# EAGLE board Lightbar (x2) (EAGLE 9.6.2)
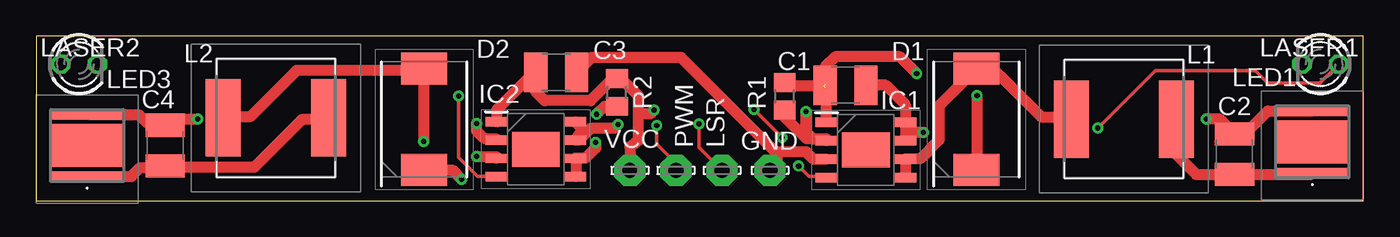
[diagram p0: board, top side]
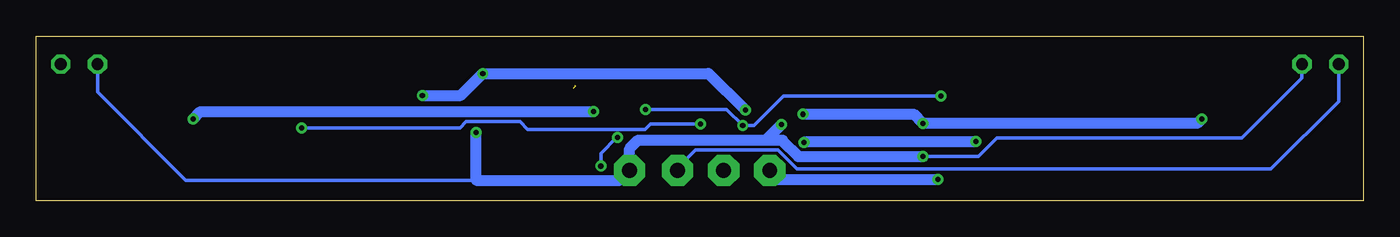
[diagram p1: board, bottom side, seen from below]

Size 91.42 x 11.35 mm. Coordinates in mm from the lower left corner, seen from the top.
Outline: 0,0 91.42,0 91.42,11.35 0,11.35 0,0
Copper layers (1*16): Top 0.035mm / dielectric 1.5mm / Bottom 0.035mm
Design rules "default": minimum track width 6mil, minimum drill 0.35mm, track to track 6mil, track to pad 6mil, pad to pad 6mil, via to via 6mil, smd to smd 6mil, copper to edge 40mil, drill to drill 6mil, minimum pad ring 10mil, minimum via ring 8mil, stop-mask expansion 4mil, vias tented up to drill 0mil, thermal gap 10mil

## Footprints (pad centres in the part's own frame; a part is rotated, then mirrored left to right if it is on the bottom)
C1210 = smd 1.6 x 2.7: 1 -1.4,0; 2 1.4,0
DIOM7959X262N = smd 2.2 x 3.15: 1 -3.5,0; 2 3.5,0
LSP10 = drill 1.016 pad 2.159 octagon: MP 0,0
SOIC127P600X175-9N = smd 1.525 x 0.65: 1 -2.712,1.905; 2 -2.712,0.635; 3 -2.712,-0.635; 4 -2.712,-1.905; 5 2.712,-1.905; 6 2.712,-0.635; 7 2.712,0.635; 8 2.712,1.905 | smd 3.3 x 2.41: 9 0,0
IHLP3232DZER330M11 = smd 2.413 x 5.334: 1 -3.619,0; 2 3.619,0
LED3MM = drill 0.813 octagon: A -1.27,0; K 1.27,0
XMLDWT0000000000U40E2 = smd 0.7 x 4.98: 1 -2.14,0; 2 2.14,0 | smd 2.98 x 4.98: 3 0,0
R0805 = smd 1.3 x 1.5: 1 -0.95,0; 2 0.95,0

## Placement (x,y rotation side)
C1  22μF  [C1210]  55.75,7.97 0 top
C2  10μF  [C1210]  82.55,3.22 90 top
C3  22μF  [C1210]  35.81,8.86 0 top
C4  10μF  [C1210]  8.89,3.81 90 top
D1  SS34-E3_57T  [DIOM7959X262N]  64.77,5.62 90 top
D2  SS34-E3_57T  [DIOM7959X262N]  26.73,5.62 90 top
GND  LSP10  [LSP10]  50.55,2.1 0 top
IC1  PAM2863ECR  [SOIC127P600X175-9N]  57.15,3.5 0 top
IC2  PAM2863ECR  [SOIC127P600X175-9N]  34.42,3.56 0 top
L1  IHLP3232DZER330M11  [IHLP3232DZER330M11]  74.93,5.64 0 top
L2  IHLP3232DZER330M11  [IHLP3232DZER330M11]  16.51,5.71 0 top
LASER1  TLLG4400  [LED3MM]  88.47,9.42 180 top
LASER2  TLLG4400  [LED3MM]  2.95,9.42 0 top
LED1  XMLDWT-00-0000-0000U40E2  [XMLDWT0000000000U40E2]  87.91,4.06 90 top
LED3  XMLDWT-00-0000-0000U40E2  [XMLDWT0000000000U40E2]  3.51,3.81 90 top
LSR  LSP10  [LSP10]  47.24,2.1 0 top
PWM  LSP10  [LSP10]  44.07,2.1 0 top
R1  0.05Ω 1/4W  [R0805]  51.56,7.21 90 top
R2  0.05Ω 1/4W  [R0805]  40.01,7.47 90 top
VCC  LSP10  [LSP10]  40.89,2.1 0 top

## Library data of the parts
C1-C4 = rcl; SPICEPREFIX: C
D1 D2 = SS34-E3_57T; DESCRIPTION: Vishay SS34-E3/57T SMT Schottky Diode, 40V 3A, 2-Pin DO-214AB; HEIGHT: 2.62mm; MANUFACTURER_NAME: Vishay; MANUFACTURER_PART_NUMBER: SS34-E3/57T; MOUSER_PART_NUMBER: 625-SS34-E3; MOUSER_PRICE-STOCK: https://www.mouser.co.uk/ProductDetail/Vishay-General-Semiconductor/SS34-E3-57T?qs=x2jpVgRnAtMC3f38kYWnRw%3D%3D
GND LSR PWM VCC = solpad
IC1 IC2 = PAM2863ECR; DESCRIPTION: Step-down LED Driver 1MHz 40V 2A SOP-8EP DiodesZetex PAM2863ECR LED Driver IC, 4.5 40 V dc 2A 8-Pin SOP; HEIGHT: 1.75mm; MANUFACTURER_NAME: Diodes Inc.; MANUFACTURER_PART_NUMBER: PAM2863ECR; MOUSER_PART_NUMBER: 621-PAM2863ECR; MOUSER_PRICE-STOCK: https://www.mouser.co.uk/ProductDetail/Diodes-Incorporated/PAM2863ECR?qs=pYVYkI7xuRXLW6Fe66wa3w%3D%3D
L1 L2 = IHLP3232DZER330M11; DESCRIPTION: VISHAY - IHLP3232DZER330M11 - INDUCTOR, POWER, 33UH, 3.2A, 20%; HEIGHT: 4mm; MANUFACTURER_NAME: Vishay; MANUFACTURER_PART_NUMBER: IHLP3232DZER330M11; MOUSER_PART_NUMBER: 70-IHLP3232DZER330M1; MOUSER_PRICE-STOCK: https://www.mouser.co.uk/ProductDetail/Vishay-Dale/IHLP3232DZER330M11?qs=Nbmv7C3%2FzlCWG7z%252BjqZ9qQ%3D%3D
LASER1 LASER2 = led; MF: VISHAY SEMICONDUCTOR; OC_FARNELL: 1612435
LED1 LED3 = XMLDWT-00-0000-0000U40E2; DESCRIPTION: High Power LEDs - White White 5700K 340lm; HEIGHT: 3.02mm; MANUFACTURER_NAME: CREE LED; MANUFACTURER_PART_NUMBER: XMLDWT-00-0000-0000U40E2; MOUSER_PART_NUMBER: 941-XMLDWT0000U40E2; MOUSER_PRICE-STOCK: https://www.mouser.co.uk/ProductDetail/Cree-Inc/XMLDWT-00-0000-0000U40E2?qs=OlC7AqGiEDlKbRHig9Whrw%3D%3D
R1 R2 = rcl; SPICEPREFIX: R

## Nets
GND: C1.2 C3.2 GND.MP IC1.3 IC1.7 IC1.8 IC2.3 IC2.7 IC2.8 LASER1.K LASER2.K
N$1: C2.1 L1.2 LED1.1
N$3: C2.2 IC1.2 LED1.2 R1.1
N$4: C1.1 C3.1 D1.1 D2.1 IC1.1 IC2.1 R1.2 R2.2 VCC.MP
N$5: D1.2 IC1.5 IC1.6 L1.1
N$7: D2.2 IC2.5 IC2.6 L2.1
N$8: C4.1 L2.2 LED3.1
N$9: C4.2 IC2.2 LED3.2 R2.1
N$10: LASER1.A LASER2.A LSR.MP
PWM1: IC1.4 IC2.4 PWM.MP

## Tracks (layer width: path | path; a pad name or v marks a point on that pad's centre or on a via)
GND  (via drill 0.35)
  Top 0.152: 59.89,4.27 IC1.7 | 59.89,5.33 IC1.8 | GND.MP
  Top 0.762: 59.89,5.33 59.89,4.72 | 59.89,4.72 59.89,4.27 | IC1.8 59.87,6.63 58.52,7.97 C1.2 | IC2.8 37.67,4.92 IC2.7 37.38,4.19 38.2,5 39.83,5 v40.08,5.26 | IC1.3 53.55,2.87 53.04,3.38 50.93,3.38 | v30.33,3.05 31.7,3.05 IC2.3 | 50.93,3.38 51.05,3.25 51.05,2.6 GND.MP | 50.93,3.38 44.42,9.88 38.25,9.88 37.28,8.86 C3.2 | v61.11,4.72 59.89,4.72
  Bottom 0.152: 40.01,4.19 40.03,4.17
  Bottom 0.254: LASER2.K 4.22,8.46 8.36,4.32 25.25,4.32 26.52,3.05 v30.33,3.05 | LASER1.K 87.2,7.5 81.13,1.42 61.11,1.42
  Bottom 0.762: v30.33,3.05 38.91,3.05 40.03,4.17 | 41.15,4.19 49.96,4.19 50.55,3.61 GND.MP 51.22,1.42 61.11,1.42 v61.11,4.72 | 41.15,4.19 40.01,4.19 | 41.15,4.19 v40.08,5.26
N$1
  Top 0.152: L1.2 78.55,3.19 | 87.81,1.82 LED1.1
  Top 0.762: 78.55,3.19 79.92,1.82 C2.1 87.81,1.82
N$3  (via drill 0.35)
  Top 0.152: 54.41,4.27 IC1.2
  Top 0.762: R1.1 51.56,5.79 53.09,4.27 54.41,4.27 | IC1.2 54.31,4.26 53.52,4.26 53.03,4.75 v53.03,6.15 | v80.62,5.64 81.53,5.64 82.45,4.72 C2.2 82.6,4.72 83.38,4.72 84.86,6.2 LED1.2
  Bottom 0.762: v80.62,5.64 80.11,6.15 v53.03,6.15
N$4  (via drill 0.35)  (2 unrouted)
  Top 0.152: C1.1 54.35,9.24 | 54.41,5.49 IC1.1
  Top 0.762: 54.27,7.91 51.81,7.91 R1.2 | 54.41,7.77 54.41,5.49 | 54.35,9.24 55.04,9.93 59.51,9.93 v60.66,8.79 | v64.82,7.26 64.82,2.17 D1.1 | IC2.1 31.73,5.46 31.73,6.27 34.29,8.84 C3.1 34.41,7.52 35.03,6.91 38.2,6.91 39.71,8.42 R2.2 40.26,8.42 40.27,8.4 40.35,8.37 41.5,7.21 41.5,5.99 | 41.5,5.99 41.5,4.17 40.89,3.71 VCC.MP | D2.1 28.67,2.12 v29.31,1.47 | 41.5,5.99 42.32,5.99 v42.57,6.25
  Bottom 0.762: v64.82,7.26 62.18,7.26 v60.66,8.79 45.11,8.79 v42.57,6.25 | VCC.MP 40.27,1.47 v29.31,1.47
N$5
  Top 0.152: 59.89,1.68 IC1.5 | 59.89,2.74 IC1.6 59.89,2.9 | 71.17,5.79 L1.1
  Top 0.762: 59.89,2.74 59.89,1.68 | 59.89,2.9 60.91,2.9 62.2,4.19 62.2,6.55 D1.2 65.92,9.12 69.24,5.79 71.17,5.79
N$7  (via drill 0.35)
  Top 0.152: 37.19,1.68 IC2.5 | 37.19,2.9 IC2.6 | 26.7,9.09 D2.2 26.67,8.99 | 12.95,5.79 L2.1
  Top 0.762: 37.19,2.9 37.19,1.68 | v38.53,4.01 38.53,3.63 37.82,2.92 IC2.6 | 26.7,9.09 v26.7,4.09 | 12.95,5.79 14.73,5.79 17.93,8.99 26.67,8.99
  Bottom 0.762: v26.7,4.09 38.46,4.09 v38.53,4.01
N$8
  Top 0.152: 8.84,2.29 C4.1 | 3.66,1.68 LED3.1 | 20.12,5.64 L2.2
  Top 0.762: 8.84,2.29 7.16,2.29 6.55,1.68 3.66,1.68 | 20.12,5.64 18.34,5.64 15.01,2.31 8.99,2.31 C4.1
N$9  (via drill 0.35)
  Top 0.152: IC2.2 31.67,4.22 31.67,4.27 | 8.84,5.33 C4.2 | 3.66,5.94 LED3.2
  Top 0.762: R2.1 39.16,6.52 v38.61,5.97 | v30.33,5.33 30.33,4.83 30.89,4.27 31.67,4.27 | 8.84,5.33 7.67,5.33 7.06,5.94 3.66,5.94 | v11.12,5.64 9.3,5.64 8.99,5.33 C4.2
  Bottom 0.762: v38.61,5.97 30.96,5.97 v30.33,5.33 11.43,5.33 v11.12,5.64
N$10  (via drill 0.35)
  Top 0.254: LSR.MP 45.67,3.67 v45.67,5.31 | LASER1.A 88.47,8.15 88.47,8.13 84.84,8.13 83.97,8.99 77.11,8.99 v73.15,5.03
  Bottom 0.152: LSR.MP 47.24,2.26
  Bottom 0.254: LASER2.A 1.68,6.86 6.35,2.18 39.01,2.18 40.34,3.5 46,3.5 47.24,2.26 | v73.15,5.03 62.23,5.03 61.8,5.46 58.09,5.46 57.56,4.93 49.48,4.93 49.1,5.31 v45.67,5.31
PWM1  (via drill 0.35)
  Top 0.152: 31.7,1.68 IC2.4
  Top 0.254: 31.7,1.68 30.4,1.68 29.08,3 v29.08,7.24 | v42.75,5.18 42.75,3.91 44.07,2.59 PWM.MP | v52.53,2.39 53.24,1.68 54.41,1.68 IC1.4 | v51.38,4.37 v49.45,6.3
  Bottom 0.152: v51.38,4.37 51.44,4.37
  Bottom 0.254: v29.08,7.24 39.93,7.24 41.99,5.18 v42.75,5.18 43.87,6.3 v49.45,6.3 | 51.44,4.37 52.53,3.28 v52.53,2.39